# Altium PCB PowerUnit.PcbDoc
Units mil, origin at the board's own origin, x right, y up, seen from the top; angles counter-clockwise.
Board outline 3188.98 x 1968.5 mil, 2 copper layers (Top Layer, Bottom Layer); 29 components, 13 nets, 88 pads, 195 vias.
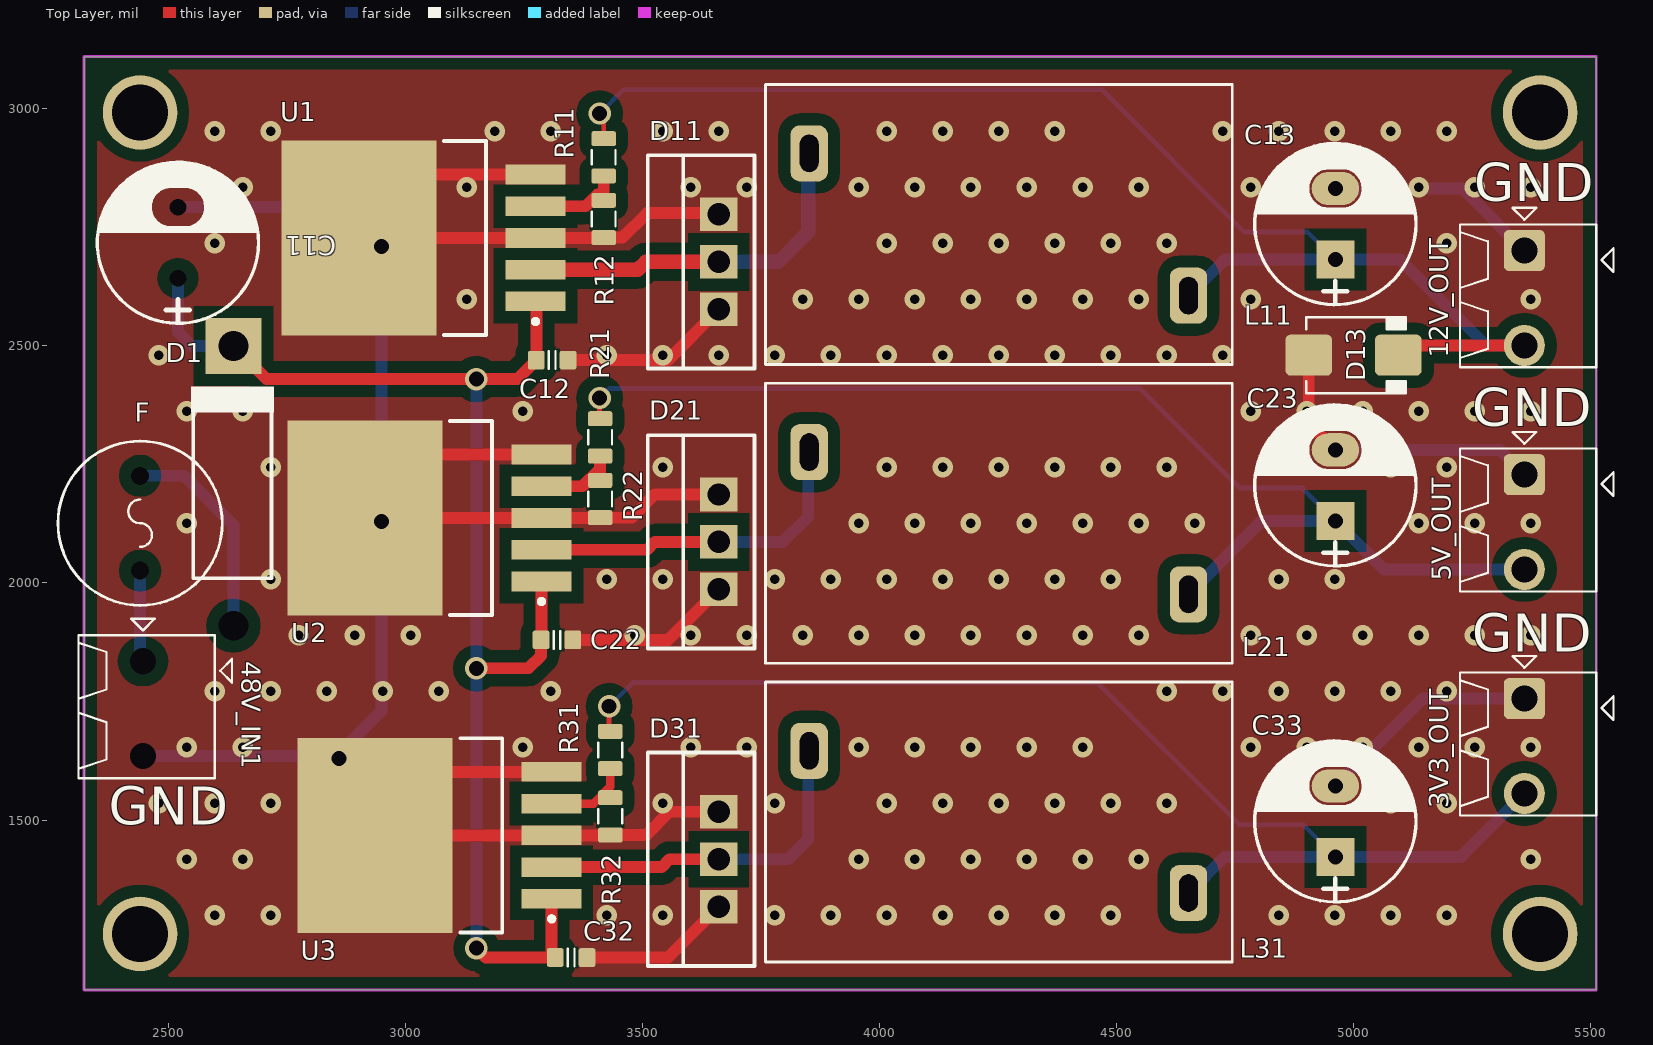
[diagram p0: Top Layer view]
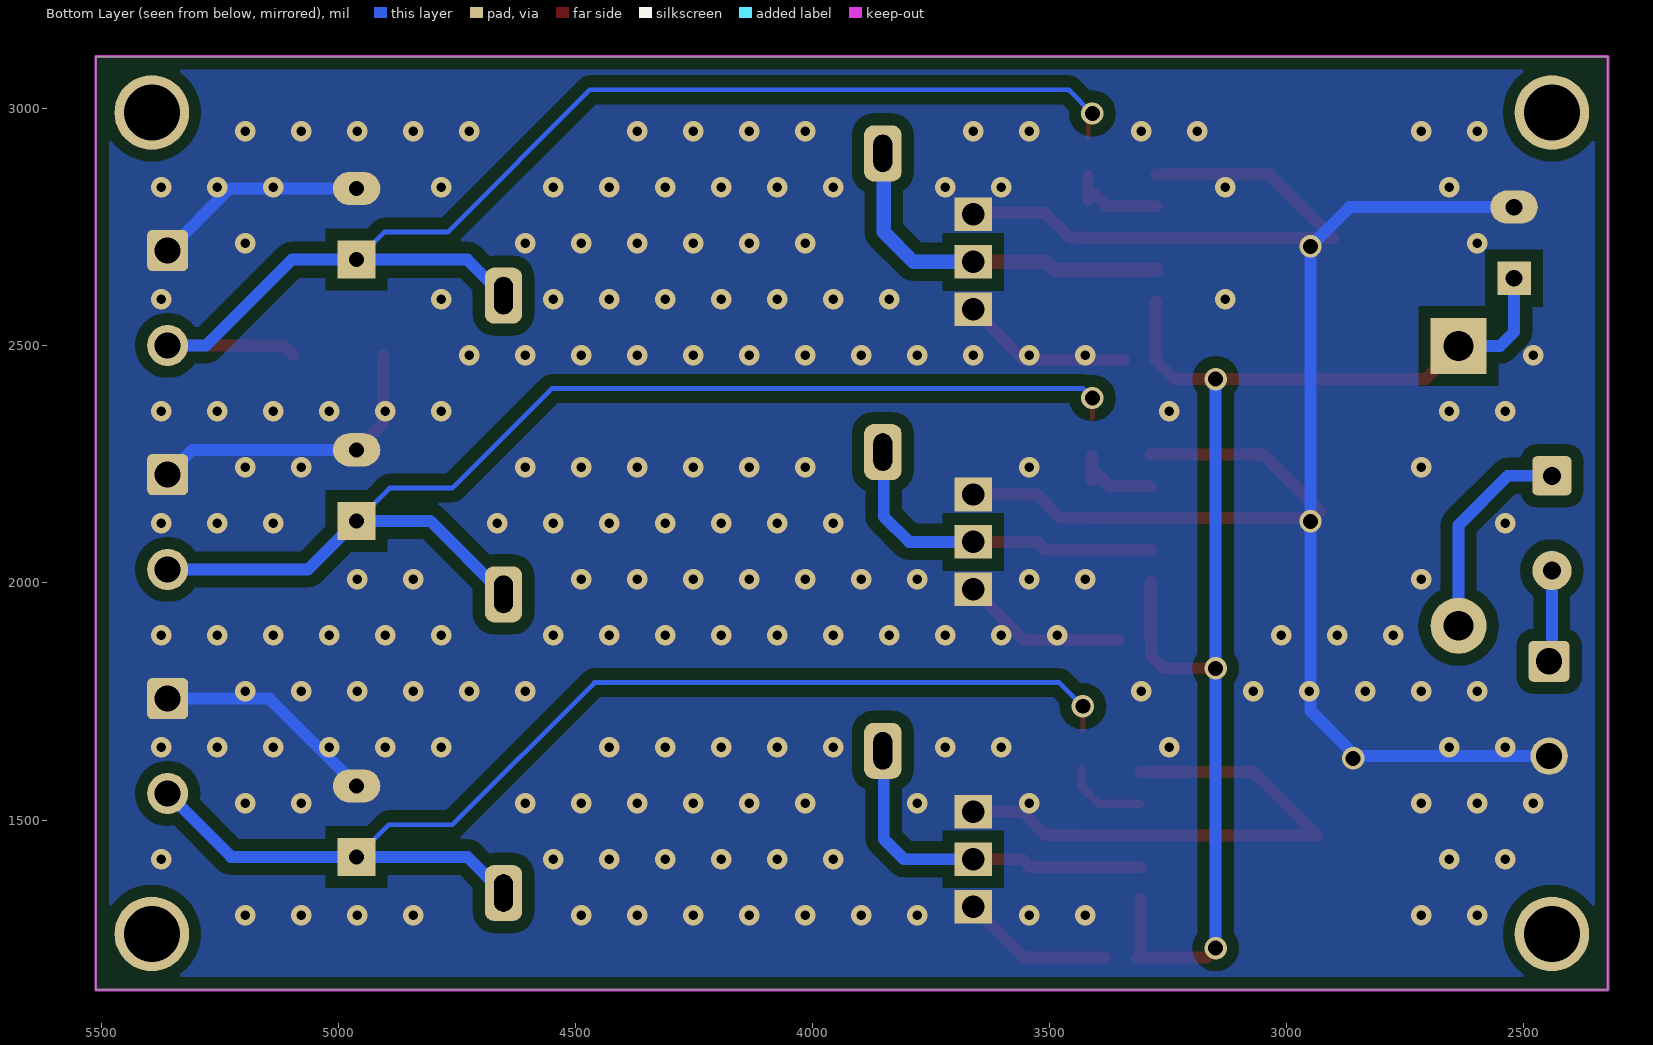
[diagram p1: Bottom Layer view, seen from below]
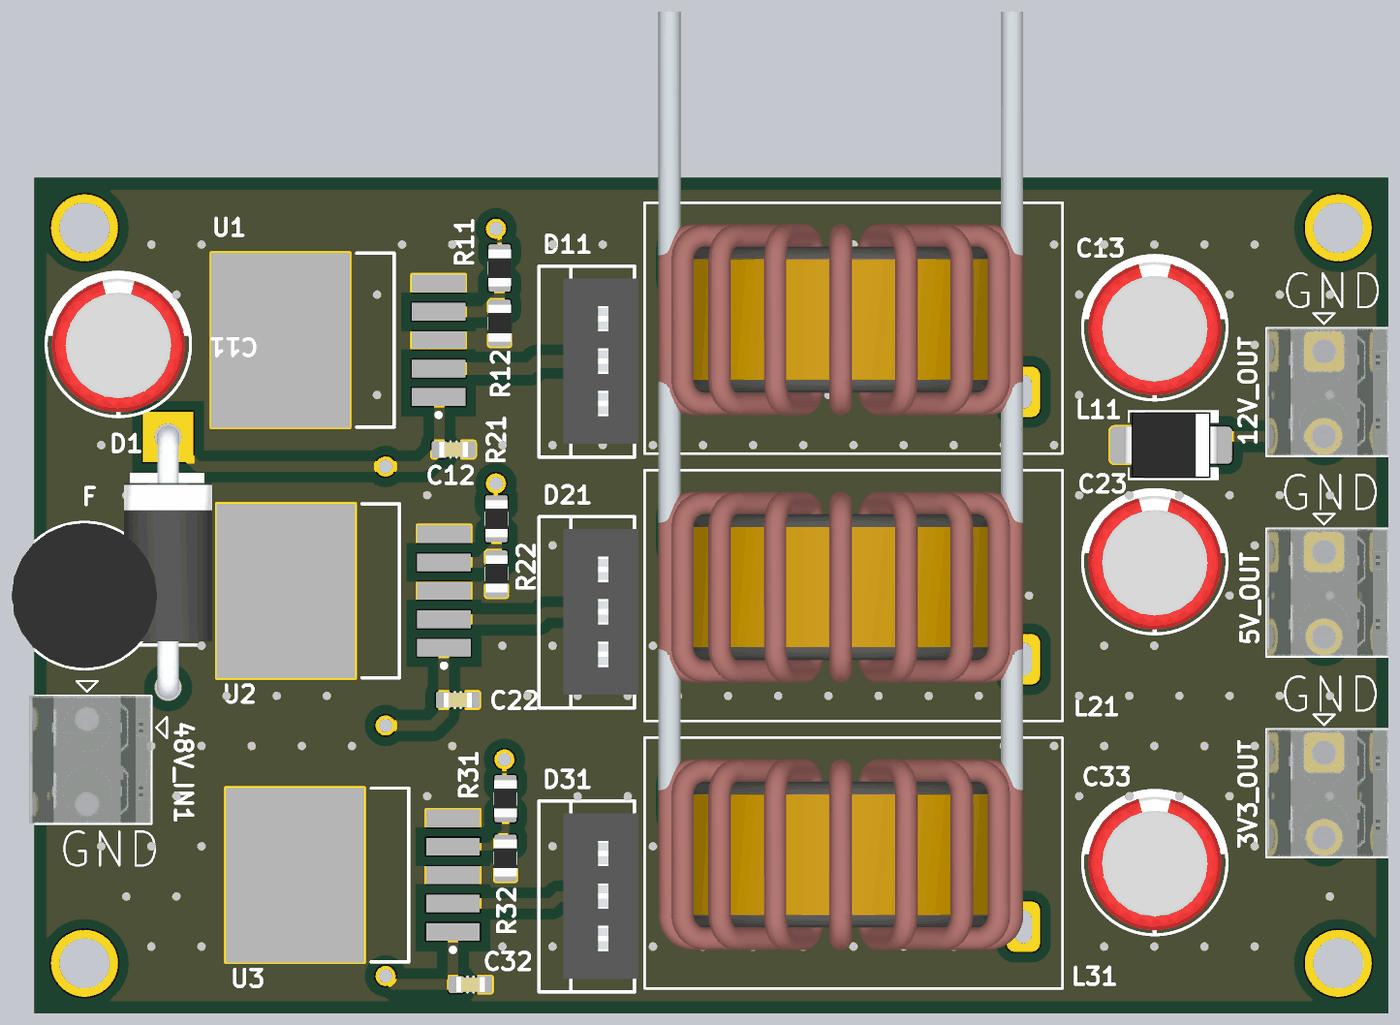
[diagram p2: 3D render of the assembled board from above, using the file's embedded part models]

## Layer stack, top to bottom
Top Solder: solder mask 0.4, Solder Resist, Dk 3.5
Top Layer: signal copper 1.4
Dielectric 1: dielectric 12.6, FR-4, Dk 4.8
Bottom Layer: signal copper 1.4
Bottom Solder: solder mask 0.4, Solder Resist, Dk 3.5

## Board outline
2322.83,1141.73 5511.81,1141.73 5511.81,3110.24 2322.83,3110.24

## Design rules (kind name [scope] priority, off if disabled: settings)
Clearance [All] p1: gap=25
PlaneConnect [All] p1: planeconnectstyle=Direct reliefexpansion=20 reliefentries=4 reliefconductorwidth=10 reliefairgap=10
PolygonConnect [All] p1: connectstyle=Direct reliefconductorwidth=10 reliefentries=4 polygonreliefangle="90 Angle" airgapwidth=10
RoutingVias [All] p1: holewidth=28 width=50 viastyle="Through Hole" minholewidth=19.68 minwidth=43.31 maxholewidth=196.85 maxwidth=196.85
SolderMaskExpansion [All] p1: expansion=4
Width [All] p1: maxlimit=78.74 minlimit=10 preferedwidth=10
29 further rules are at their usual default settings.

## Components (designator, comment, footprint, x,y, rotation, side; value= is the part's Value field where it differs from the comment)
3V3_OUT "Stackable ScrewTerm" 2P_PCB_ScrewTerm_200mil#1 5511.81,1811.02 r180 top
5V_OUT "Stackable ScrewTerm" 2P_PCB_ScrewTerm_200mil#1 5511.81,2283.46 r180 top
12V_OUT "Stackable ScrewTerm" 2P_PCB_ScrewTerm_200mil#1 5511.81,2755.91 r180 top
48V_IN1 "Stackable ScrewTerm" 2P_PCB_ScrewTerm_200mil#2 2598.43,1889.76 r180 top
C11 "Cap" "CAP 3.8mm"#1 2519.68,2716.54 r90 top
C12 "CAP NP" CAPC1608N 3310,2470 r180 top
C13 "Cap" "CAP 3.8mm"#2 4960.63,2755.91 r90 top
C22 "CAP NP" CAPC1608N 3320,1880 r180 top
C23 "Cap" "CAP 3.8mm"#2 4960.63,2204.72 r90 top
C32 "CAP NP" CAPC1608N 3350,1210 r180 top
C33 "Cap" "CAP 3.8mm"#2 4960.63,1496.06 r90 top
D1 "SS14" "Diode 3A" 2637.8,2204.72 r90 top
D11 "MOSPEC S20C40C" TO-220 3661.42,2677.17 r90 top
D13 "TVS12V" DO-214AA 5000,2480.32 r0 top
D21 "MOSPEC S20C40C" TO-220 3661.42,2086.61 r90 top
D31 "MOSPEC S20C40C" TO-220 3661.42,1417.32 r90 top
F "1.5A" FUSE_SR-5-BK 2440.94,2125.98 r270 top
L11 "Inductor" "Indutor V" 4251.97,2755.91 r0 top
L21 "Inductor" "Indutor V" 4251.97,2125.98 r0 top
L31 "Inductor" "Indutor V" 4251.97,1496.06 r0 top
R11 "Res" RESC2012N 3418.58,2897.56 r90 top
R12 "Res" RESC2012N 3418.58,2767.56 r90 top
R21 "Res" RESC2012N 3411.18,2307.01 r90 top
R22 "Res" RESC2012N 3411.18,2177.01 r90 top
R31 "Res" RESC2012N 3432.52,1647.72 r90 top
R32 "Res" RESC2012N 3432.52,1507.72 r90 top
U1 "LM2596HV-ADJ" TS5B_N 3038.58,2727.56 r180 top
U2 "LM2596HV-ADJ" TS5B_N 3051.18,2137.01 r180 top
U3 "LM2596HV-ADJ" TS5B_N 3072.52,1467.72 r180 top

## Footprints (in the part's own frame and the unit in brackets; to place one, negate y for a bottom-side part, rotate by r counter-clockwise, add the part's x,y. Pads: shape width x height; smd on the part's side, far side on the other; paste and mask are expansions set on the pad)
2P_PCB_ScrewTerm_200mil#1 [mm]
  rrect25% 2.2x2.2 hole 1.4: 1(3.85,1.397)
  round 2.2 hole 1.4: 2(3.85,6.477)
  silkscreen extent -0.93,-0.89 7.3,7.66, body extent 0,0 7.3,7.62, height 8.5
2P_PCB_ScrewTerm_200mil#2 [mm]
  rrect25% 0x0 / inner rrect25% 0x0 / far side rrect25% 2.2x2.2 hole 1.4: 1(3.85,1.397)
  round 0 / inner round 0 / far side round 2 hole 1.4: 2(3.85,6.477)
  silkscreen extent -0.93,-0.89 7.3,7.66, body extent 0,0 7.3,7.62, height 8.5
"CAP 3.8mm"#1 [mil] "16V 470uF"
  rect 0x0 / inner rect 0x0 / far side rect 70.87x70.87 hole 35.43: 1(-74,-1)
  round 0 / inner round 0 / far side oval 70x100 hole 35.43: 2(76,-1)
  silkscreen extent -169,-171 171,169, body extent -159,-158 156,156, height 446
"CAP 3.8mm"#2 [mil] "16V 470uF"
  rect 80x80 hole 31.5: 1(-74,-1)
  oval 70x100 hole 31.5: 2(76,-1)
  silkscreen extent -169,-171 171,169, body extent -159,-158 156,156, height 446
CAPC1608N [mm] "Chip Capacitor, Body 1.6x0.8mm, 0603, IPC Medium Density"
  round 0.254 on Mech14: 0(0,0)
  rrect25% 0.9x1 smd: 1(-0.85,0) 2(0.85,0)
  Top Layer pour cut-out: -0.4,0.6 0.4,0.6 0.4,-0.6 -0.4,-0.6
  silkscreen extent -0.18,-0.48 0.18,0.48, body extent -0.85,-0.45 0.85,0.45, height 0.89
"Diode 3A" [mm] "Diode Schottky 1N5822"
  round 0 / inner round 0 / far side round 3 hole 1.6: A(-7.493,0)
  rect 3x3 hole 1.6: K(7.493,0)
  silkscreen extent -4.95,-2.16 5.33,2.29, body extent -8.15,-2.65 8.15,2.65, height 6.3
DO-214AA [mm] "JEDEC DO214 variation AA. SMB"
  round 0.508 on Mech14: 0(0,0)
  rrect25% 2.5x2.2 smd: A(-2.4,0) K(2.4,0)
  silkscreen extent -2.54,-2.03 2.79,2.03, body extent -2.8,-1.97 2.8,1.98, height 2.62
FUSE_SR-5-BK [mil]
  round 19.68 on Mech14: 0(0,0)
  rrect25% 0x0 / inner rrect25% 0x0 / far side rrect25% 82.68x82.68 hole 38: 1(-100,0)
  round 0 / inner round 0 / far side round 82.68 hole 38: 2(100,0)
  silkscreen extent -173,-173 173,173, body extent -171,-170 171,170, height 326
"Indutor V" [mm]
  rrect50% 2x3 hole 1 slot 2 at 90 deg: 1(-10.16,3.81) 2(10.16,-3.81)
  silkscreen extent -12.5,-7.5 12.5,7.5, body extent -11.68,-5.21 10.16,18.92, height 21.92
RESC2012N [mm] "Chip Resistor, Body 2.0x1.2mm, 0805, IPC Medium Density"
  round 0.254 on Mech14: 0(0,0)
  rrect25% 0.8x1.3 smd: 1(-1,0) 2(1,0)
  Top Layer pour cut-out: -0.6,0.75 0.6,0.75 0.6,-0.75 -0.6,-0.75
  silkscreen extent -0.38,-0.64 0.38,0.64, body extent -1.1,-0.67 1.1,0.68, height 0.69
TO-220 [mm]
  rect 1.8x2 hole 1.2: 1(-2.54,0) 2(0,0) 3(2.54,0)
  silkscreen extent -5.71,-1.91 5.71,3.81, body extent -4.92,-2.13 4.98,2.37, height 8.08
TS5B_N [mm] "D2-PAK, 6-Leads, Body 8.6x10.2mm, Pitch 1.7mm, Lead Span 14.1mm, IPC Medium Density"
  rect 3.2x1.05 smd: 1(-6,3.4) 2(-6,1.7) 3(-6,0) 4(-6,-1.7) 5(-6,-3.4)
  rect 8.3x10.45 smd: 6(3.45,0)
  silkscreen extent -6.13,-5.2 -1.1,5.2, body extent -3.35,-5.2 6.05,5.2, height 4.65

## Part data
3V3_OUT 5V_OUT 12V_OUT 48V_IN1: library part 2P_ScrewTerm_90S_3.81MM, "Terminal Block Screw Type THT 2-Position 3.81mm pitch"
D1 D13: library part "Diode Schottky"
D11 D21 D31: library part "Diode x2"
F: library part Fuse
U1 U2 U3: library part LM2596S-ADJ, "SIMPLE SWITCHER Power Converter 150 KHz 3A Step-Down Voltage Regulator"

## Free pads (board coordinates)
  round 157.48 hole 118.11: NC(2440.94,1259.84) NC(2440.94,2992.13) NC(5393.7,1259.84) NC(5393.7,2992.13)

## Via types
v1: diameter 43.31, hole 19.68, Top Layer to Bottom Layer, tented both sides, 186 vias
v2: diameter 47.24, hole 31.5, Top Layer to Bottom Layer, 9 vias

## Nets (pads, with @x,y where several pads share a name; then routed paths per layer and width w, separated by ;. In a path a pad name is that pad's centre, name@x,y a point inside that pad or via, vN(x,y) a via of type N, cw(c..) or ccw(c..) an arc to the next point about the centre after c; other vN are vias at no path point)
+3V3: 3V3_OUT.2 C33.1 L31.2 R31.2 | length 2553.9
  Top Layer w10: v2(3430,1740) 3430,1689.61 R31.2
  Bottom Layer w10: v2(3430,1740) 3480,1790 4460,1790 4760,1490 4893.69,1490 C33.1
  Bottom Layer w25: L31.2 4727.97,1422.06 C33.1 5226.28,1422.06 3V3_OUT.2
+5V: 5V_OUT.2 C23.1 L21.2 R21.2 | length 2534.4
  Top Layer w10: v2(3410,2390) 3410,2347.56 R21.2
  Bottom Layer w10: v2(3410,2390) 3430,2410 4550,2410 4760,2200 4892.35,2200 C23.1
  Bottom Layer w25: L21.2 4806.71,2130.72 C23.1 5063.89,2028.46 5V_OUT.2
+12V: 12V_OUT.2 C13.1 D13.K L11.2 R11.2 | length 2866.3
  Top Layer w10: v2(3410,2990) 3418.58,2981.42 R11.2
  Top Layer w25: D13.K 5115.08,2500.91 12V_OUT.2
  Bottom Layer w10: v2(3410,2990) 3460,3040 4470,3040 4770,2740 4903.54,2740 C13.1
  Bottom Layer w25: L11.2 4727.97,2681.91 C13.1 5098.09,2681.91 5279.09,2500.91 12V_OUT.2
+48V: 48V_IN1.1 F.2 | length 193.7
  Bottom Layer w25: F.2 2440.94,1840.67 48V_IN1.1
FB1: R11.1 R12.2 U1.4 | length 192.7
  Top Layer w25: U1.4 3380.51,2794.49 R12.2@3405.77,2819.74 ; R12.2 R11.1
FB2: R21.1 R22.2 U2.4 | length 188.8
  Top Layer w25: U2.4 3373.94,2203.94 3410,2240 ; R22.2 R21.1
FB3: R31.1 R32.2 U3.4 | length 176.8
  Top Layer w18: U3.4 3397.17,1534.65 3432.52,1570 R31.1
GND: 3V3_OUT.1 5V_OUT.1 12V_OUT.1 48V_IN1.2 C11.2 C12.1 C13.2 C22.1 C23.2 C32.1 C33.2 D11.1 D11.3 D13.A D21.1 D21.3 D31.1 D31.3 R12.1 R22.1 R32.1 U1.3 U1.5 U1.6 U2.3 U2.5 U2.6 U3.3 U3.5 U3.6 | length 8122.7
  Top Layer w25: U2.6@2929.17,2150.83 3049.21,2270.87 U2.5 ; U2.6@2950,2137.01 U2.3 3410.55,2137.01 R22.1 3477.64,2137.64 3526.61,2186.61 D21.3 ; U1.5 3036.61,2861.42 U1.6 U1.3 3417.95,2727.56 R12.1 3458.19,2728.19 3510,2780 3658.58,2780 D11.3 ; U3.5 3070.55,1601.57 U3.6 U3.3 3431.89,1467.72 R32.1 3508.35,1468.35 3557.32,1517.32 D31.3 ; C12.1 3554.25,2470 D11.1 ; C22.1 3554.8,1880 D21.1 ; C32.1 3554.09,1210 D31.1 ; D13.A 4905.51,2336.84 C23.2
  Bottom Layer w25: 48V_IN1.2 v2@2854.76,1634.76 ; C11.2 2867.46,2792.54 v2(2950,2710) v2(2950,2130) 2950,1730 v2@2854.76,1634.76 ; v2(2860,1630) 2855.24,1634.76 v2@2854.76,1634.76 ; C33.2 5145.59,1756.02 3V3_OUT.1 ; C23.2 5307.98,2280.72 5V_OUT.1 ; C13.2 5229.24,2831.91 12V_OUT.1
  other v1: 2598.42,1299.21 2716.53,1299.21 3425.2,1299.21 3543.31,1299.21 3779.53,1299.21 3897.64,1299.21 4015.75,1299.21 4133.86,1299.21 4251.97,1299.21 4370.08,1299.21 4488.19,1299.21 4842.52,1299.21 4960.63,1299.21 5078.74,1299.21 5196.85,1299.21 2539.37,1417.32 2657.48,1417.32 3956.69,1417.32 4074.8,1417.32 4192.91,1417.32 4311.02,1417.32 4429.13,1417.32 4547.24,1417.32 5374.01,1417.32 2480.31,1535.43 2598.42,1535.43 2716.53,1535.43 3543.31,1535.43 3779.53,1535.43 4015.75,1535.43 4133.86,1535.43 4251.97,1535.43 4370.08,1535.43 4488.19,1535.43 4606.3,1535.43 5078.74,1535.43 5196.85,1535.43 2539.37,1653.54 2657.48,1653.54 3248.03,1653.54 3602.36,1653.54 3720.47,1653.54 3956.69,1653.54 4074.8,1653.54 4192.91,1653.54 4311.02,1653.54 4429.13,1653.54 4783.46,1653.54 4901.57,1653.54 5019.68,1653.54 5137.79,1653.54 5255.9,1653.54 5374.01,1653.54 2598.42,1771.65 2716.53,1771.65 2834.64,1771.65 2952.76,1771.65 3070.87,1771.65 3307.09,1771.65 4606.3,1771.65 4724.41,1771.65 4842.52,1771.65 4960.63,1771.65 5078.74,1771.65 5196.85,1771.65 2775.59,1889.76 2893.7,1889.76 3011.81,1889.76 3484.25,1889.76 3602.36,1889.76 3720.47,1889.76 3838.58,1889.76 3956.69,1889.76 4074.8,1889.76 4192.91,1889.76 4311.02,1889.76 4429.13,1889.76 4547.24,1889.76 4783.46,1889.76 4901.57,1889.76 5019.68,1889.76 5137.79,1889.76 5255.9,1889.76 5374.01,1889.76 2716.53,2007.87 3425.2,2007.87 3543.31,2007.87 3779.53,2007.87 3897.64,2007.87 4015.75,2007.87 4133.86,2007.87 4251.97,2007.87 4370.08,2007.87 4488.19,2007.87 4842.52,2007.87 4960.63,2007.87 2539.37,2125.98 3956.69,2125.98 4074.8,2125.98 4192.91,2125.98 4311.02,2125.98 4429.13,2125.98 4547.24,2125.98 4665.35,2125.98 5137.79,2125.98 5255.9,2125.98 5374.01,2125.98 2716.53,2244.09 3543.31,2244.09 4015.75,2244.09 4133.86,2244.09 4251.97,2244.09 4370.08,2244.09 4488.19,2244.09 4606.3,2244.09 5078.74,2244.09 5196.85,2244.09 2539.37,2362.2 2657.48,2362.2 3248.03,2362.2 4783.46,2362.2 4901.57,2362.2 5019.68,2362.2 5137.79,2362.2 5255.9,2362.2 5374.01,2362.2 2480.31,2480.31 3425.2,2480.31 3543.31,2480.31 3661.42,2480.31 3779.53,2480.31 3897.64,2480.31 4015.75,2480.31 4133.86,2480.31 4251.97,2480.31 4370.08,2480.31 4488.19,2480.31 4606.3,2480.31 4724.41,2480.31 3129.92,2598.42 3838.58,2598.42 3956.69,2598.42 4074.8,2598.42 4192.91,2598.42 4311.02,2598.42 4429.13,2598.42 4547.24,2598.42 4783.46,2598.42 5374.01,2598.42 2598.42,2716.53 4015.75,2716.53 4133.86,2716.53 4251.97,2716.53 4370.08,2716.53 4488.19,2716.53 4606.3,2716.53 5196.85,2716.53 2657.48,2834.64 3129.92,2834.64 3602.36,2834.64 3720.47,2834.64 3956.69,2834.64 4074.8,2834.64 4192.91,2834.64 4311.02,2834.64 4429.13,2834.64 4547.24,2834.64 4783.46,2834.64 5137.79,2834.64 5255.9,2834.64 5374.01,2834.64 2598.42,2952.76 2716.53,2952.76 3188.98,2952.76 3307.09,2952.76 3543.31,2952.76 3661.42,2952.76 4015.75,2952.76 4133.86,2952.76 4251.97,2952.76 4370.08,2952.76 4724.41,2952.76 4842.52,2952.76 4960.63,2952.76 5078.74,2952.76 5196.85,2952.76
NetD1_1: D1.A F.1 | length 452.3
  Bottom Layer w25: F.1 2534.02,2225.98 2637.8,2122.2 D1.A
SW1: D11.2 L11.1 U1.2 | length 774.8
  Top Layer w30: U1.2 3490.63,2660.63 3507.17,2677.17 D11.2
  Bottom Layer w30: D11.2 3787.17,2677.17 3850,2740 3850,2903.94 L11.1
SW2: D21.2 L21.1 U2.2 | length 728.4
  Top Layer w25: U2.2 3510.08,2070.08 3526.61,2086.61 D21.2
  Bottom Layer w25: D21.2 3796.61,2086.61 3850,2140 3850,2274.02 L21.1
SW3: D31.2 L31.1 U3.2 | length 752.7
  Top Layer w25: U3.2 3540.79,1400.79 3557.32,1417.32 D31.2
  Bottom Layer w25: D31.2 3807.32,1417.32 3850,1460 3850,1644.09 L31.1
VIN: C11.1 C12.2 C22.2 C32.2 D1.K U1.1 U2.1 U3.1 | length 2857.6
  Top Layer w25: D1.K 2707.52,2430 v2(3150,2430) 3236.54,2430 C12.2 3276.54,2591.97 U1.1 ; v2(3150,1230) 3170,1210 C32.2 3308.74,1217.8 U3.1 ; v2(3150,1820) 3260,1820 3286.54,1846.54 C22.2 3287.4,1880.87 U2.1
  Bottom Layer w25: C11.1 2520.68,2529.32 2550,2500 2637.52,2500 D1.K ; v2(3150,1230) v2(3150,1820) v2(3150,2430)
pads on no net: C12.0 C22.0 C32.0 D13.0 F.0 R11.0 R12.0 R21.0 R22.0 R31.0 R32.0

## Polygon pours and split planes (outlines as drawn)
GND on Top Layer "Top Layer-No Net" (solid, remove dead copper, pour order 6): 2322.83,3110.24 5511.81,3110.24 5511.81,1141.73 2322.83,1141.73
GND on Bottom Layer "Top Layer-No Net" (solid, remove dead copper, pour order 8): 2322.83,1141.73 5511.81,1141.73 5511.81,3110.24 2322.83,3110.24

## Keep-outs
Keep-Out Layer:
  the board outline again, w5.91

## Silkscreen, mask and mechanical layers (free items; w line width, h text height)
Top Overlay:
  text "GND" at 5255,2805 h80
  text "GND" at 5250,2330 h80
  text "GND" at 5250,1855 h80
  text "GND" at 2375,1490 h80